# Altium PCB 18650_13s8p.PcbDoc
Units mm, origin at the board's own origin, x right, y up, seen from the top; angles counter-clockwise.
Board outline 80.8 x 121.3 mm, 2 copper layers (Top Layer, Bottom Layer); 89 components, 5 nets, 350 pads, 239 vias.
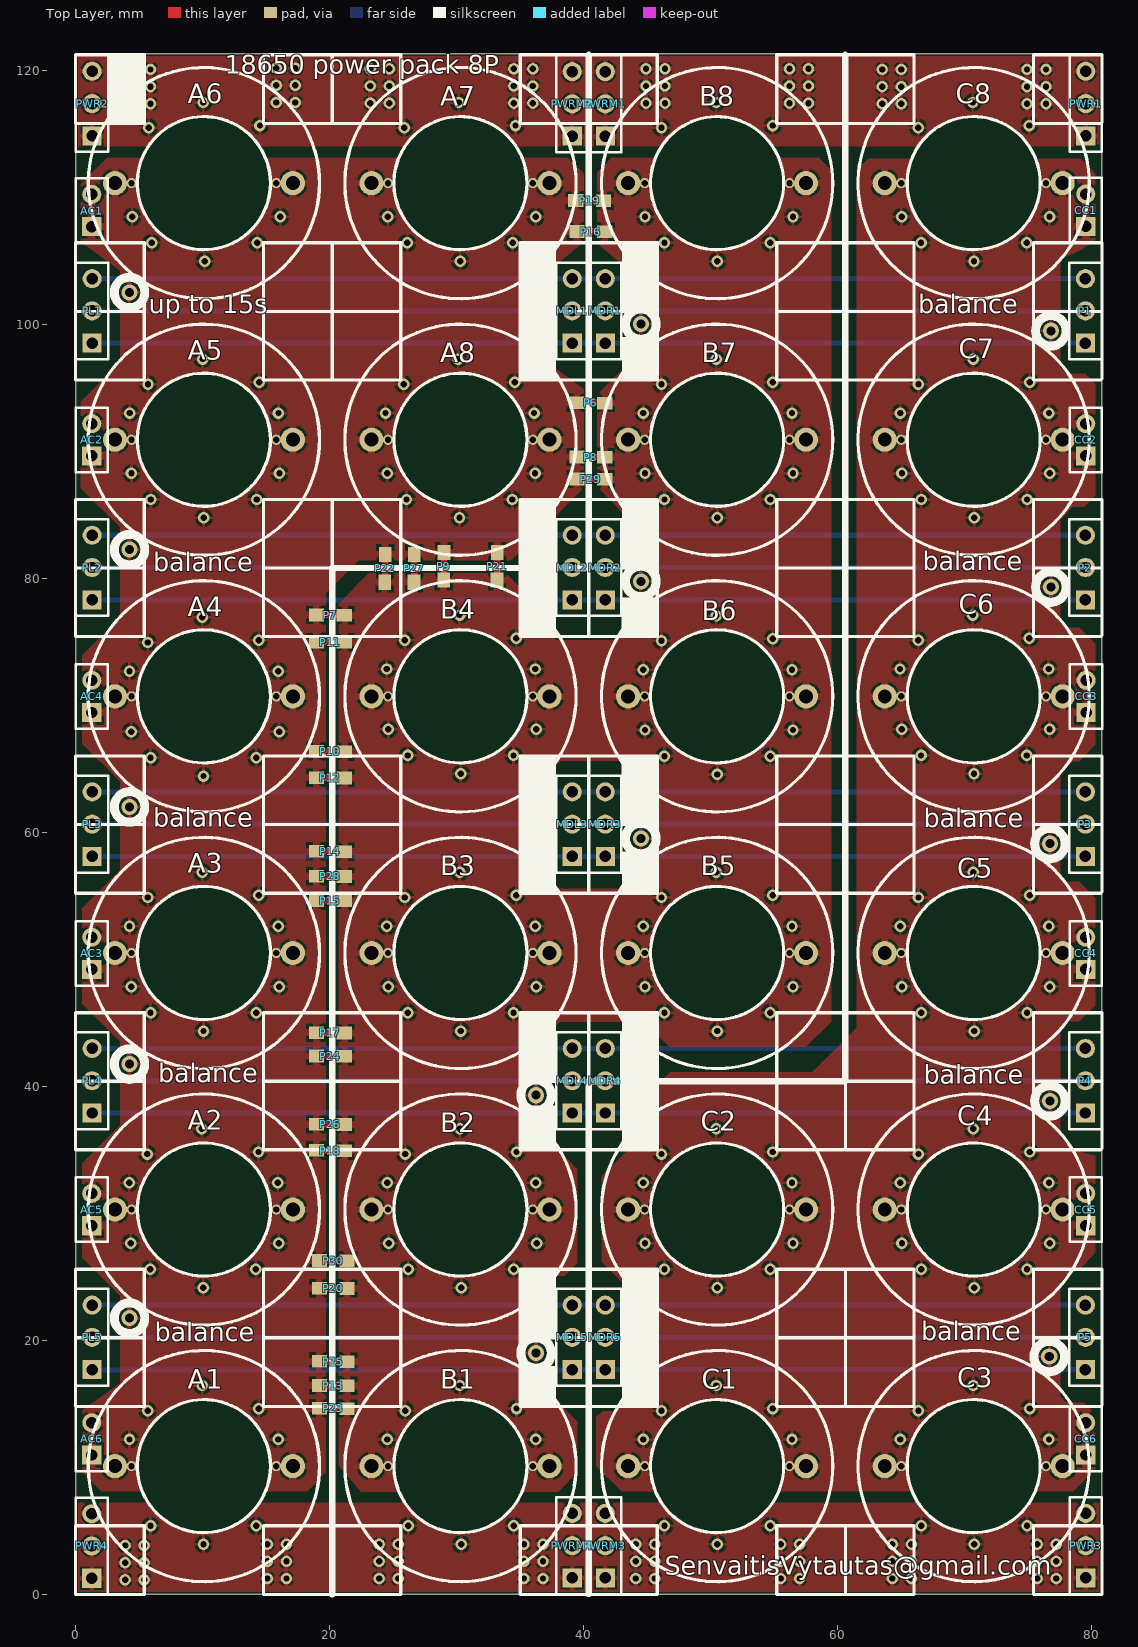
[diagram p0: Top Layer view]
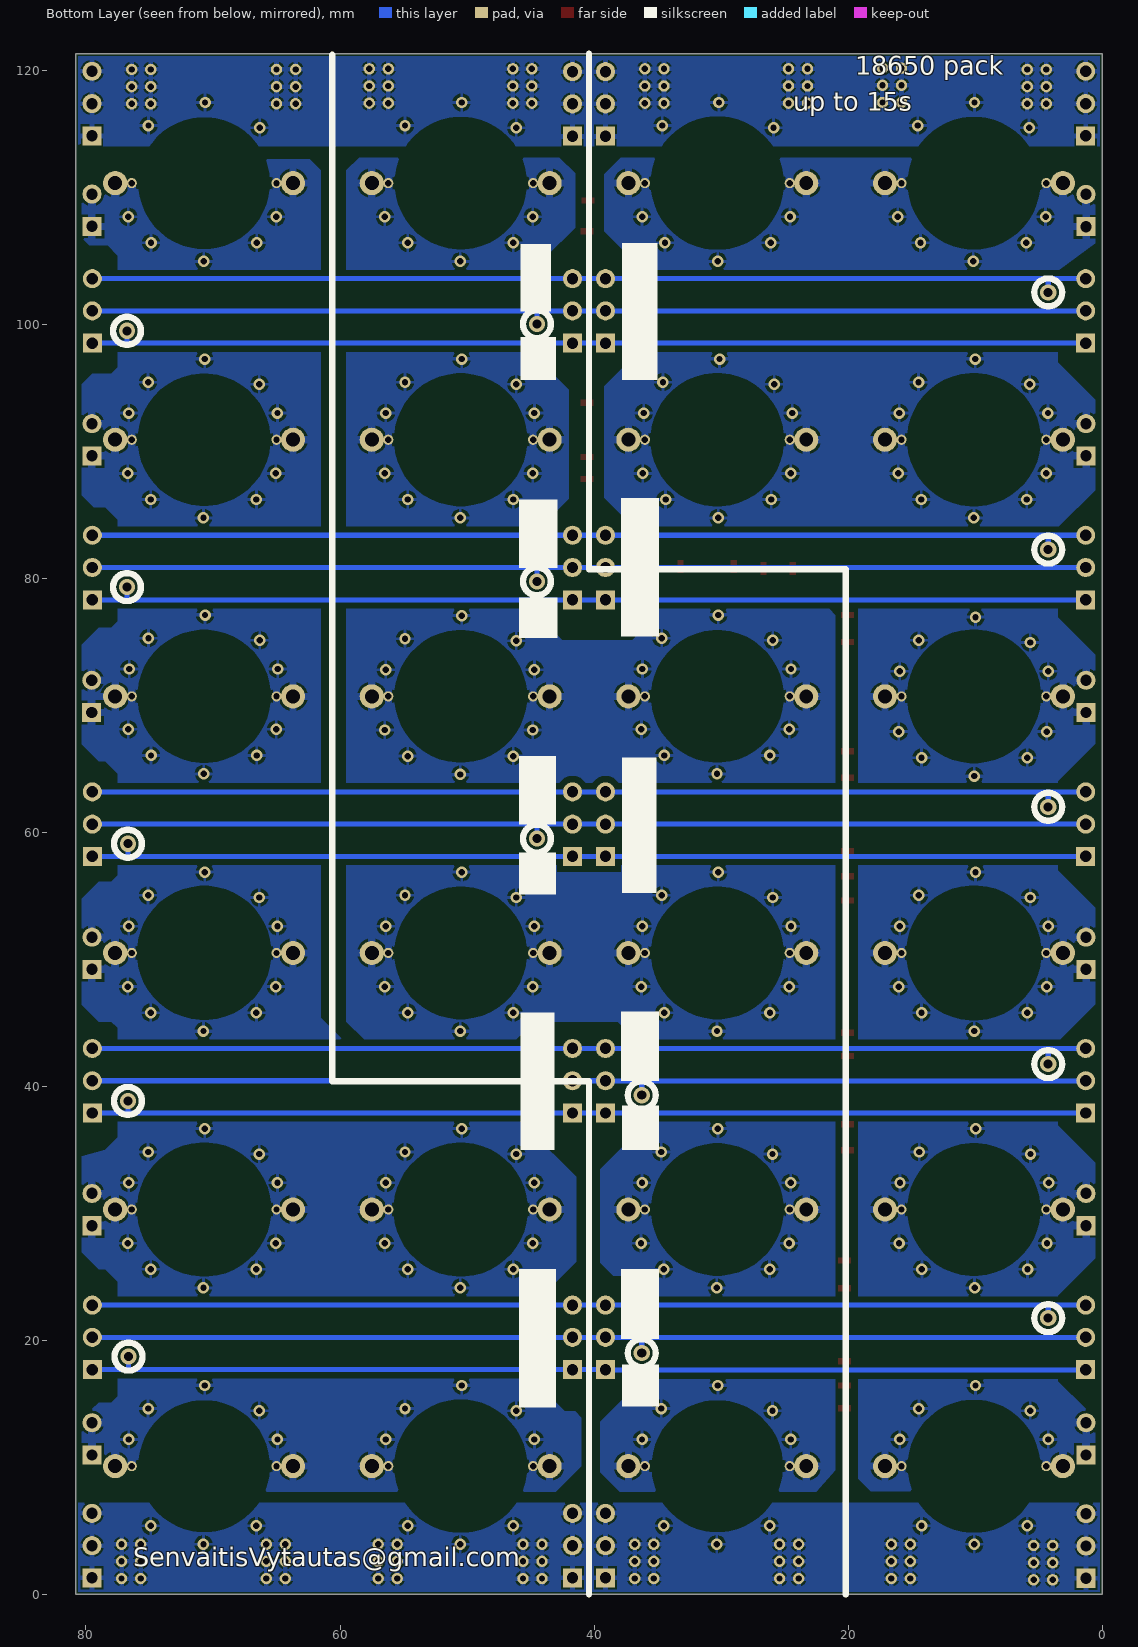
[diagram p1: Bottom Layer view, seen from below]

## Layer stack, top to bottom
Top Solder: solder mask 0.0102, Solder Resist, Dk 3.5
Top Layer: signal copper 0.0356
Dielectric 1: dielectric 0.32, FR-4, Dk 4.8
Bottom Layer: signal copper 0.0356
Bottom Solder: solder mask 0.0102, Solder Resist, Dk 3.5

## Board outline
0,0 80.8,0 80.8,121.3 0,121.3

## Design rules (kind name [scope] priority, off if disabled: settings)
Clearance [All] p1: gap=0.5 ignorepadtopadclearanceinfootprint=FALSE except(0: Arc-Hole Track-Hole SMDPad-Hole THPad-Hole Via-Hole Fill-Hole Poly-Hole Region-Hole Text-Hole)
ComponentClearance [All] p1 off: gap=0.254 collisioncheckmode=3 verticalgap=0.254 showdistances=FALSE
Height [All] p1 off: minheight=0 maxheight=25.4 prefheight=12.7
MinimumSolderMaskSliver [All] p1 off: minsoldermaskwidth=0.254
PolygonConnect PolygonConnect_11 [All vs IsNamedPolygon('PACK3_bottom')] p1: thpad.connectstyle=Relief thpad.reliefconductorwidth=0.6 thpad.reliefentries=4 thpad.polygonreliefangle="90 Angle" thpad.airgapwidth=0.2 smdpad.connectstyle=Relief smdpad.reliefconductorwidth=0.6 smdpad.reliefentries=4 smdpad.polygonreliefangle="90 Angle" smdpad.airgapwidth=0.2 via.connectstyle=Relief via.reliefconductorwidth=0.254 via.reliefentries=4 via.polygonreliefangle="90 Angle" via.airgapwidth=0.254
PolygonConnect PolygonConnect_10 [All vs IsNamedPolygon('PACK2_BOTTOM')] p2: thpad.connectstyle=Relief thpad.reliefconductorwidth=0.6 thpad.reliefentries=4 thpad.polygonreliefangle="90 Angle" thpad.airgapwidth=0.2 smdpad.connectstyle=Relief smdpad.reliefconductorwidth=0.6 smdpad.reliefentries=4 smdpad.polygonreliefangle="90 Angle" smdpad.airgapwidth=0.2 via.connectstyle=Relief via.reliefconductorwidth=0.254 via.reliefentries=4 via.polygonreliefangle="90 Angle" via.airgapwidth=0.254
PolygonConnect PolygonConnect_9 [All vs IsNamedPolygon('PACK1_BOTOM')] p3: thpad.connectstyle=Relief thpad.reliefconductorwidth=0.6 thpad.reliefentries=4 thpad.polygonreliefangle="90 Angle" thpad.airgapwidth=0.2 smdpad.connectstyle=Relief smdpad.reliefconductorwidth=0.6 smdpad.reliefentries=4 smdpad.polygonreliefangle="90 Angle" smdpad.airgapwidth=0.2 via.connectstyle=Relief via.reliefconductorwidth=0.254 via.reliefentries=4 via.polygonreliefangle="90 Angle" via.airgapwidth=0.254
PolygonConnect PolygonConnect_8 [All vs IsNamedPolygon('PACK3')] p4: thpad.connectstyle=Relief thpad.reliefconductorwidth=0.6 thpad.reliefentries=4 thpad.polygonreliefangle="90 Angle" thpad.airgapwidth=0.2 smdpad.connectstyle=Relief smdpad.reliefconductorwidth=0.6 smdpad.reliefentries=4 smdpad.polygonreliefangle="90 Angle" smdpad.airgapwidth=0.2 via.connectstyle=Relief via.reliefconductorwidth=0.254 via.reliefentries=4 via.polygonreliefangle="90 Angle" via.airgapwidth=0.254
PolygonConnect PolygonConnect_7 [All vs IsNamedPolygon('PACK2')] p5: thpad.connectstyle=Relief thpad.reliefconductorwidth=0.6 thpad.reliefentries=4 thpad.polygonreliefangle="90 Angle" thpad.airgapwidth=0.2 smdpad.connectstyle=Relief smdpad.reliefconductorwidth=0.6 smdpad.reliefentries=4 smdpad.polygonreliefangle="90 Angle" smdpad.airgapwidth=0.2 via.connectstyle=Relief via.reliefconductorwidth=0.254 via.reliefentries=4 via.polygonreliefangle="90 Angle" via.airgapwidth=0.254
PolygonConnect PolygonConnect_6 [All vs IsNamedPolygon('PACK1')] p6: thpad.connectstyle=Relief thpad.reliefconductorwidth=0.6 thpad.reliefentries=4 thpad.polygonreliefangle="90 Angle" thpad.airgapwidth=0.2 smdpad.connectstyle=Relief smdpad.reliefconductorwidth=0.6 smdpad.reliefentries=4 smdpad.polygonreliefangle="90 Angle" smdpad.airgapwidth=0.2 via.connectstyle=Relief via.reliefconductorwidth=0.254 via.reliefentries=4 via.polygonreliefangle="90 Angle" via.airgapwidth=0.254
PolygonConnect PolygonConnect_5 [All vs IsNamedPolygon('PWR22_botom')] p7: thpad.connectstyle=Relief thpad.reliefconductorwidth=0.4 thpad.reliefentries=4 thpad.polygonreliefangle="90 Angle" thpad.airgapwidth=0.15 smdpad.connectstyle=Relief smdpad.reliefconductorwidth=0.6 smdpad.reliefentries=4 smdpad.polygonreliefangle="90 Angle" smdpad.airgapwidth=0.2 via.connectstyle=Relief via.reliefconductorwidth=0.254 via.reliefentries=4 via.polygonreliefangle="90 Angle" via.airgapwidth=0.254
PolygonConnect PolygonConnect_4 [All vs IsNamedPolygon('PWR22')] p8: thpad.connectstyle=Relief thpad.reliefconductorwidth=0.4 thpad.reliefentries=4 thpad.polygonreliefangle="90 Angle" thpad.airgapwidth=0.15 smdpad.connectstyle=Relief smdpad.reliefconductorwidth=0.6 smdpad.reliefentries=4 smdpad.polygonreliefangle="90 Angle" smdpad.airgapwidth=0.2 via.connectstyle=Relief via.reliefconductorwidth=0.254 via.reliefentries=4 via.polygonreliefangle="90 Angle" via.airgapwidth=0.254
PolygonConnect PolygonConnect_3 [All vs IsNamedPolygon('PWR11')] p9: thpad.connectstyle=Relief thpad.reliefconductorwidth=0.4 thpad.reliefentries=4 thpad.polygonreliefangle="90 Angle" thpad.airgapwidth=0.15 smdpad.connectstyle=Relief smdpad.reliefconductorwidth=0.6 smdpad.reliefentries=4 smdpad.polygonreliefangle="90 Angle" smdpad.airgapwidth=0.2 via.connectstyle=Relief via.reliefconductorwidth=0.254 via.reliefentries=4 via.polygonreliefangle="90 Angle" via.airgapwidth=0.254
PolygonConnect PolygonConnect_2 [All vs IsNamedPolygon('PWR11_botom')] p10: thpad.connectstyle=Relief thpad.reliefconductorwidth=0.4 thpad.reliefentries=4 thpad.polygonreliefangle="90 Angle" thpad.airgapwidth=0.15 smdpad.connectstyle=Relief smdpad.reliefconductorwidth=0.6 smdpad.reliefentries=4 smdpad.polygonreliefangle="90 Angle" smdpad.airgapwidth=0.2 via.connectstyle=Relief via.reliefconductorwidth=0.254 via.reliefentries=4 via.polygonreliefangle="90 Angle" via.airgapwidth=0.254
PolygonConnect PolygonConnect_1 [All vs IsNamedPolygon('PACK2-_L01_P056')] p11: thpad.connectstyle=Relief thpad.reliefconductorwidth=0.5 thpad.reliefentries=4 thpad.polygonreliefangle="90 Angle" thpad.airgapwidth=0.5 smdpad.connectstyle=Relief smdpad.reliefconductorwidth=0.6 smdpad.reliefentries=4 smdpad.polygonreliefangle="90 Angle" smdpad.airgapwidth=0.2 via.connectstyle=Relief via.reliefconductorwidth=0.254 via.reliefentries=4 via.polygonreliefangle="90 Angle" via.airgapwidth=0.254
PolygonConnect [All] p12: connectstyle=Relief reliefconductorwidth=0.6 reliefentries=4 polygonreliefangle="90 Angle" airgapwidth=0.2
RoutingVias [All] p1: holewidth=0.5 width=0.9 viastyle="Through Hole" minholewidth=0.3 minwidth=0.5 maxholewidth=5 maxwidth=8
SolderMaskExpansion [All] p1: expansion=0.102
Width [All] p1: maxlimit=10 minlimit=0.3 preferedwidth=0.5 minimp=50.000000 maximp=50.000000 favimp=50.000000
27 further rules are at their usual default settings.

## Components (designator, comment, footprint, x,y, rotation, side; value= is the part's Value field where it differs from the comment)
A1 "18650_20mmHolder" 18650holder20_2 10.1,10.1 r0 top
A2 "18650_20mmHolder" 18650holder20_2 10.1,30.3 r0 top
A3 "18650_20mmHolder" 18650holder20_2 10.1,50.5 r0 top
A4 "18650_20mmHolder" 18650holder20_2 10.1,70.7 r0 top
A5 "18650_20mmHolder" 18650holder20_2 10.1,90.9 r0 top
A6 "18650_20mmHolder" 18650holder20_2 10.1,111.1 r0 top
A7 "18650_20mmHolder" 18650holder20_2 30.3,111.1 r0 top
A8 "18650_20mmHolder" 18650holder20_2 30.3,90.9 r0 top
AC1 "Header 2" HDR1X2 1.275,107.675 r90 top
AC2 "Header 2" HDR1X2 1.275,89.625 r90 top
AC3 "Header 2" HDR1X2 1.275,49.2 r90 top
AC4 "Header 2" HDR1X2 1.275,69.425 r90 top
AC5 "Header 2" HDR1X2 1.275,29.025 r90 top
AC6 "Header 2" HDR1X2 1.275,10.975 r90 top
B1 "18650_20mmHolder" 18650holder20_2 30.3,10.1 r0 top
B2 "18650_20mmHolder" 18650holder20_2 30.3,30.3 r0 top
B3 "18650_20mmHolder" 18650holder20_2 30.3,50.5 r0 top
B4 "18650_20mmHolder" 18650holder20_2 30.3,70.7 r0 top
B5 "18650_20mmHolder" 18650holder20_2 50.5,50.5 r0 top
B6 "18650_20mmHolder" 18650holder20_2 50.5,70.7 r0 top
B7 "18650_20mmHolder" 18650holder20_2 50.5,90.9 r0 top
B8 "18650_20mmHolder" 18650holder20_2 50.5,111.1 r180 top
C1 "18650_20mmHolder" 18650holder20_2 50.5,10.1 r0 top
C2 "18650_20mmHolder" 18650holder20_2 50.5,30.3 r0 top
C3 "18650_20mmHolder" 18650holder20_2 70.7,10.1 r0 top
C4 "18650_20mmHolder" 18650holder20_2 70.7,30.3 r0 top
C5 "18650_20mmHolder" 18650holder20_2 70.7,50.5 r0 top
C6 "18650_20mmHolder" 18650holder20_2 70.7,70.7 r0 top
C7 "18650_20mmHolder" 18650holder20_2 70.7,90.9 r0 top
C8 "18650_20mmHolder" 18650holder20_2 70.7,111.1 r0 top
CC1 "Header 2" HDR1X2 79.525,107.7 r90 top
CC2 "Header 2" HDR1X2 79.525,89.625 r90 top
CC3 "Header 2" HDR1X2 79.55,69.425 r90 top
CC4 "Header 2" HDR1X2 79.525,49.2 r90 top
CC5 "Header 2" HDR1X2 79.525,29.025 r90 top
CC6 "Header 2" HDR1X2 79.525,10.975 r90 top
MDL1 "Header 3" HDR1X3 39.1,98.5 r90 top
MDL2 "Header 3" HDR1X3 39.1,78.3 r90 top
MDL3 "Header 3" HDR1X3 39.1,58.1 r90 top
MDL4 "Header 3" HDR1X3 39.1,37.9 r90 top
MDL5 "Header 3" HDR1X3 39.1,17.7 r90 top
MDR1 "Header 3" HDR1X3 41.7,98.5 r90 top
MDR2 "Header 3" HDR1X3 41.7,78.3 r90 top
MDR3 "Header 3" HDR1X3 41.7,58.1 r90 top
MDR4 "Header 3" HDR1X3 41.7,37.9 r90 top
MDR5 "Header 3" HDR1X3 41.7,17.7 r90 top
P1 "Header 3" HDR1X3 79.5,98.5 r90 top
P2 "Header 3" HDR1X3 79.5,78.3 r90 top
P3 "Header 3" HDR1X3 79.5,58.1 r90 top
P4 "Header 3" HDR1X3 79.5,37.9 r90 top
P5 "Header 3" HDR1X3 79.5,17.7 r90 top
P6 "join2" join2_0603 40.5,93.809 r0 top net-tie
P7 "join2" join2_0603 20,77.1 r0 top net-tie
P8 "join2" join2_0603 40.5,89.546 r0 top net-tie
P9 "join2" join2_0603 29,81 r270 top net-tie
P10 "join2" join2_0603 20,66.372 r0 top net-tie
P11 "join2" join2_0603 20,74.978 r0 top net-tie
P12 "join2" join2_0603 20,64.296 r0 top net-tie
P13 "join2" join2_0603 20.224,16.45 r0 top net-tie
P14 "join2" join2_0603 20,58.5 r0 top net-tie
P15 "join2" join2_0603 20,54.626 r0 top net-tie
P16 "join2" join2_0603 40.5,107.3 r0 top net-tie
P17 "join2" join2_0603 20,44.223 r0 top net-tie
P18 "join2" join2_0603 20,34.959 r0 top net-tie
P19 "join2" join2_0603 40.4,109.733 r0 top net-tie
P20 "join2" join2_0603 20.224,24.109 r0 top net-tie
P21 "join2" join2_0603 33.195,81 r270 top net-tie
P22 "join2" join2_0603 24.373,80.84 r270 top net-tie
P23 "join2" join2_0603 20.224,14.65 r0 top net-tie
P24 "join2" join2_0603 20,42.384 r0 top net-tie
P25 "join2" join2_0603 20.224,18.348 r0 top net-tie
P26 "join2" join2_0603 20,37.018 r0 top net-tie
P27 "join2" join2_0603 26.668,80.84 r270 top net-tie
P28 "join2" join2_0603 20,56.537 r0 top net-tie
P29 "join2" join2_0603 40.5,87.805 r0 top net-tie
P30 "join2" join2_0603 20.224,26.29 r0 top net-tie
PL1 "Header 3" HDR1X3 1.3,98.5 r90 top
PL2 "Header 3" HDR1X3 1.3,78.3 r90 top
PL3 "Header 3" HDR1X3 1.3,58.1 r90 top
PL4 "Header 3" HDR1X3 1.3,37.9 r90 top
PL5 "Header 3" HDR1X3 1.3,17.7 r90 top
PWR1 "Header 3" HDR1X3 79.525,114.825 r90 top
PWR2 "Header 3" HDR1X3 1.3,114.825 r90 top
PWR3 "Header 3" HDR1X3 79.525,1.3 r90 top
PWR4 "Header 3" HDR1X3 1.275,1.275 r90 top
PWRM1 "Header 3" HDR1X3 41.7,114.8 r90 top
PWRM2 "Header 3" HDR1X3 39.1,114.8 r90 top
PWRM3 "Header 3" HDR1X3 41.7,1.3 r90 top
PWRM4 "Header 3" HDR1X3 39.1,1.3 r90 top

## Footprints (in the part's own frame and the unit in brackets; to place one, negate y for a bottom-side part, rotate by r counter-clockwise, add the part's x,y. Pads: shape width x height; smd on the part's side, far side on the other; paste and mask are expansions set on the pad)
18650holder20_2 [mm] "18650 holderio footprint kad butu skyle ir sujungimai"
  round 0.8 hole 0.5: 1(5.7,0) 2(-5.7,0)
  round 1.9 hole 1.1: 1(7,0) 2(-7,0)
  silkscreen extent -10.1,-10.1 10.1,10.1, body extent -10.1,-10.1 10.1,10.1
HDR1X2 [mm] "Connector; Header; 2 Position"
  rect 1.5x1.5 hole 0.9: 1(0,0)
  round 1.5 hole 0.9: 2(2.54,0)
  silkscreen extent -1.27,-1.27 3.81,1.27, body extent -1.27,-1.27 3.81,1.27, height 8.5
HDR1X3 [mm] "Connector; Header; 3 Position"
  rect 1.5x1.5 hole 0.9: 1(0,0)
  round 1.5 hole 0.9: 2(2.54,0) 3(5.08,0)
  silkscreen extent -1.27,-1.27 6.35,1.27, body extent -1.27,-1.27 6.35,1.27, height 8.5
join2_0603 [mm] "join2 2leads"
  rect 1.2x1 smd paste+0 mask+0.102: 1(-1.025,0) 2(1.15,-0.025)
  Top Layer region: -0.45,-0.25 0.575,-0.25 0.575,0.25 -0.45,0.25

## Part data
A1 A2 A3 A4 A5 A6 A7 A8 B1 B2 B3 B4 B5 B6 B7 B8 C1 C2 C3 C4 C5 C6 C7 C8: "20mm holder 18650 sujungimai tiek - tiek pliuso", LatestRevisionDate=17-Jul-2002, LatestRevisionNote="Re-released for DXP Platform.", PackageDescription="Battery; 2 Leads", PackageReference=BAT-2, Published=24-Mar-1999, Publisher="Altium Limited"
AC1 AC2 AC3 AC4 AC5 AC6 CC1 CC2 CC3 CC4 CC5 CC6 P6 P7 P8 P9 P10 P11 P12 P13 P14 P15 P16 P17 P18 P19 P20 P21 P22 P23 P24 P25 P26 P27 P28 P29 P30: "Header, 2-Pin", LatestRevisionDate=17-Jul-2002, LatestRevisionNote="Re-released for DXP Platform.", Publisher="Altium Limited"
MDL1 MDL2 MDL3 MDL4 MDL5 MDR1 MDR2 MDR3 MDR4 MDR5 P1 P2 P3 P4 P5 PL1 PL2 PL3 PL4 PL5 PWR1 PWR2 PWR3 PWR4 PWRM1 PWRM2 PWRM3 PWRM4: "Header, 3-Pin", LatestRevisionDate=17-Jul-2002, LatestRevisionNote="Re-released for DXP Platform.", Publisher="Altium Limited"

## Free pads (board coordinates)
  round 0.9 hole 0.5 mask+0.102: 2(3.9,3.85) 2(15.1,3.95) 2(23.9,3.95) 2(35.3,3.95) 2(44.1,3.95) 2(55.5,3.95) 2(64.3,3.95) 2(75.7,3.95) 3(3.9,2.5) 3(15.1,2.6) 3(23.9,2.6) 3(35.3,2.6) 3(44.1,2.6) 3(55.5,2.6) 3(64.3,2.6) 3(75.7,2.6) 4(5.4,3.85) 4(16.6,3.95) 4(25.4,3.95) 4(36.8,3.95) 4(45.6,3.95) 4(57,3.95) 4(65.8,3.95) 4(77.2,3.95) 5(5.4,2.5) 5(16.6,2.6) 5(25.4,2.6) 5(36.8,2.6) 5(45.6,2.6) 5(57,2.6) 5(65.8,2.6) 5(77.2,2.6) 6(5.4,1.15) 6(16.6,1.25) 6(25.4,1.25) 6(36.8,1.25) 6(45.6,1.25) 6(57,1.25) 6(65.8,1.25) 6(77.2,1.25) 7(3.9,1.15) 7(15.1,1.25) 7(23.9,1.25) 7(35.3,1.25) 7(44.1,1.25) 7(55.5,1.25) 7(64.3,1.25) 7(75.7,1.25)
  round 0.9 hole 0.5: 2(4.4,120.05) 2(15.8,120.15) 2(23.2,120.1) 2(34.5,120.1) 2(44.9,120.1) 2(56.2,120.1) 2(63.5,120.05) 2(74.9,120.05) 3(4.4,118.7) 3(15.8,118.8) 3(23.2,118.75) 3(34.5,118.75) 3(44.9,118.75) 3(56.2,118.75) 3(63.5,118.7) 3(74.9,118.7) 4(5.9,120.05) 4(17.3,120.15) 4(24.7,120.1) 4(36,120.1) 4(46.4,120.1) 4(57.7,120.1) 4(65,120.05) 4(76.4,120.05) 5(5.9,118.7) 5(17.3,118.8) 5(24.7,118.75) 5(36,118.75) 5(46.4,118.75) 5(57.7,118.75) 5(65,118.7) 5(76.4,118.7) 6(5.9,117.35) 6(17.3,117.45) 6(24.7,117.4) 6(36,117.4) 6(46.4,117.4) 6(57.7,117.4) 6(65,117.35) 6(76.4,117.35) 7(4.4,117.35) 7(15.8,117.45) 7(23.2,117.4) 7(34.5,117.4) 7(44.9,117.4) 7(56.2,117.4) 7(63.5,117.35) 7(74.9,117.35)

## Via types
v1: diameter 0.9, hole 0.5, Top Layer to Bottom Layer, tented both sides, 224 vias
v2: diameter 1.27, hole 0.711, Top Layer to Bottom Layer, tented both sides, 15 vias

## Nets (pads, with @x,y where several pads share a name; then routed paths per layer and width w, separated by ;. In a path a pad name is that pad's centre, name@x,y a point inside that pad or via, vN(x,y) a via of type N, cw(c..) or ccw(c..) an arc to the next point about the centre after c; other vN are vias at no path point)
NetPWR1_1: pad.2@4.4,120.05 pad.2@15.8,120.15 pad.2@23.2,120.1 pad.2@34.5,120.1 pad.2@44.9,120.1 pad.2@56.2,120.1 pad.2@63.5,120.05 pad.2@74.9,120.05 pad.3@4.4,118.7 pad.3@15.8,118.8 pad.3@23.2,118.75 pad.3@34.5,118.75 pad.3@44.9,118.75 pad.3@56.2,118.75 pad.3@63.5,118.7 pad.3@74.9,118.7 pad.4@5.9,120.05 pad.4@17.3,120.15 pad.4@24.7,120.1 pad.4@36,120.1 pad.4@46.4,120.1 pad.4@57.7,120.1 pad.4@65,120.05 pad.4@76.4,120.05 pad.5@5.9,118.7 pad.5@17.3,118.8 pad.5@24.7,118.75 pad.5@36,118.75 pad.5@46.4,118.75 pad.5@57.7,118.75 pad.5@65,118.7 pad.5@76.4,118.7 pad.6@5.9,117.35 pad.6@17.3,117.45 pad.6@24.7,117.4 pad.6@36,117.4 pad.6@46.4,117.4 pad.6@57.7,117.4 pad.6@65,117.35 pad.6@76.4,117.35 pad.7@4.4,117.35 pad.7@15.8,117.45 pad.7@23.2,117.4 pad.7@34.5,117.4 pad.7@44.9,117.4 pad.7@56.2,117.4 pad.7@63.5,117.35 pad.7@74.9,117.35 PWR1.1 PWR1.2 PWR1.3 PWR2.1 PWR2.2 PWR2.3 PWRM1.1 PWRM1.2 PWRM1.3 PWRM2.1 PWRM2.2 PWRM2.3
  other v1: 5.757,115.466 25.873,115.467 46.127,115.466 66.327,115.467 14.514,115.632 34.63,115.632 54.884,115.632 75.084,115.632 10.057,117.45 30.173,117.45 50.427,117.45 70.627,117.45
NetPWR3_1: pad.2@3.9,3.85 pad.2@15.1,3.95 pad.2@23.9,3.95 pad.2@35.3,3.95 pad.2@44.1,3.95 pad.2@55.5,3.95 pad.2@64.3,3.95 pad.2@75.7,3.95 pad.3@3.9,2.5 pad.3@15.1,2.6 pad.3@23.9,2.6 pad.3@35.3,2.6 pad.3@44.1,2.6 pad.3@55.5,2.6 pad.3@64.3,2.6 pad.3@75.7,2.6 pad.4@5.4,3.85 pad.4@16.6,3.95 pad.4@25.4,3.95 pad.4@36.8,3.95 pad.4@45.6,3.95 pad.4@57,3.95 pad.4@65.8,3.95 pad.4@77.2,3.95 pad.5@5.4,2.5 pad.5@16.6,2.6 pad.5@25.4,2.6 pad.5@36.8,2.6 pad.5@45.6,2.6 pad.5@57,2.6 pad.5@65.8,2.6 pad.5@77.2,2.6 pad.6@5.4,1.15 pad.6@16.6,1.25 pad.6@25.4,1.25 pad.6@36.8,1.25 pad.6@45.6,1.25 pad.6@57,1.25 pad.6@65.8,1.25 pad.6@77.2,1.25 pad.7@3.9,1.15 pad.7@15.1,1.25 pad.7@23.9,1.25 pad.7@35.3,1.25 pad.7@44.1,1.25 pad.7@55.5,1.25 pad.7@64.3,1.25 pad.7@75.7,1.25 PWR3.1 PWR3.2 PWR3.3 PWR4.1 PWR4.2 PWR4.3 PWRM3.1 PWRM3.2 PWRM3.3 PWRM4.1 PWRM4.2 PWRM4.3
  other v1: 10.073,3.95 30.354,3.95 50.527,3.95 70.754,3.95 5.904,5.397 14.223,5.397 26.185,5.397 34.504,5.397 46.358,5.397 54.677,5.397 66.585,5.397 74.904,5.397
PACK1+: A1.1 A1.2 A2.1 A2.2 A3.1 A3.2 A4.1 A4.2 A5.1 A5.2 A6.1 A6.2 A7.1 A7.2 A8.1 A8.2 AC1.1 AC1.2 AC2.1 AC2.2 AC3.1 AC3.2 AC4.1 AC4.2 AC5.1 AC5.2 AC6.1 AC6.2 MDL1.3 MDL2.3 MDL3.3 MDL4.3 MDL5.3 MDR1.3 MDR2.3 MDR3.3 MDR4.3 MDR5.3 P1.3 P2.3 P3.3 P4.3 P5.3 P6.1 P7.1 P8.1 P9.1 P10.1 P11.1 P12.1 P13.1 P14.1 P15.1 P16.1 P17.1 P18.1 P19.1 P20.1 P21.1 P22.1 P23.1 P24.1 P25.1 P26.1 P27.1 P28.1 P29.1 P30.1 PL1.3 PL2.3 PL3.3 PL4.3 PL5.3 | length 396.6
  Top Layer w0.5: A2.1@17.1,30.3 A2.1@17.125,30.275
  Bottom Layer w0.4: PL5.3 4.25,22.78 ; PL4.3 4.25,42.98 ; PL3.3 4.25,63.18 ; PL2.3 4.25,83.38 ; PL1.3 4.25,103.58 ; v2(4.25,21.75) 4.25,22.78 ; v2(4.25,41.75) 4.25,42.98 ; v2(4.25,62) 4.25,63.18 ; v2(4.25,82.25) 4.25,83.38 ; v2(4.25,102.5) 4.25,103.58 ; P4.3@79.4,42.98 MDR4.3 MDL4.3 4.25,42.98 ; P5.3 MDR5.3 MDL5.3 4.25,22.78 ; P3.3 MDR3.3 MDL3.3 4.25,63.18 ; P2.3 MDR2.3 MDL2.3 4.25,83.38 ; P1.3 MDR1.3 MDL1.3 4.25,103.58
  other v1: 4.246,12.2 15.944,12.2 5.673,14.466 14.43,14.631 9.973,16.45 10.046,24.15 5.877,25.597 14.196,25.597 4.346,27.65 15.994,27.65 4.219,32.4 15.917,32.4 5.646,34.666 14.403,34.832 9.946,36.65 10.073,44.35 5.904,45.797 14.223,45.797 4.373,47.85 16.021,47.85 4.246,52.6 15.944,52.6 5.673,54.866 14.43,55.032 9.973,56.85 10.073,64.423 5.904,65.87 14.223,65.87 4.373,67.923 16.021,67.923 4.246,72.673 15.944,72.673 5.673,74.939 14.43,75.105 9.973,76.923 10.1,84.75 30.223,84.75 5.931,86.197 14.25,86.197 26.054,86.197 34.373,86.197 4.4,88.25 16.048,88.25 24.523,88.25 36.171,88.25 4.273,93 15.971,93 24.396,93 36.094,93 5.7,95.266 25.823,95.266 14.457,95.432 34.58,95.432 10,97.25 30.123,97.25 10.157,104.95 30.273,104.95 5.987,106.397 14.307,106.397 26.104,106.397 34.423,106.397 4.457,108.45 16.105,108.45 24.573,108.45 36.221,108.45
PACK2-: B1.1 B1.2 B2.1 B2.2 B3.1 B3.2 B4.1 B4.2 B5.1 B5.2 B6.1 B6.2 B7.1 B7.2 B8.1 B8.2 MDL1.2 MDL2.2 MDL3.2 MDL4.2 MDL5.2 MDR1.2 MDR2.2 MDR3.2 MDR4.2 MDR5.2 P1.2 P2.2 P3.2 P4.2 P5.2 P6.2 P7.2 P8.2 P9.2 P10.2 P11.2 P12.2 P13.2 P14.2 P15.2 P16.2 P17.2 P18.2 P19.2 P20.2 P21.2 P22.2 P23.2 P24.2 P25.2 P26.2 P27.2 P28.2 P29.2 P30.2 PL1.2 PL2.2 PL3.2 PL4.2 PL5.2 | length 396.3
  Bottom Layer w0.4: PL5.2 36.25,20.24 ; PL4.2 1.325,40.415 36.25,40.415 ; PL3.2 MDL3.2 MDR3.2 44.5,60.64 ; PL2.2 MDL2.2 MDR2.2 44.5,80.84 ; PL1.2 MDL1.2 MDR1.2 P1.2 ; v2(36.25,19) 36.25,20.24 ; v2(36.25,39.3) 36.25,40.415 ; v2(44.5,59.5) 44.5,60.64 ; v2(44.5,79.75) 44.5,80.84 ; v2(44.5,100) 44.5,100.79 ; P4.2@79.4,40.44 MDR4.2 MDL4.2 39.075,40.415 36.25,40.415 ; P5.2 MDR5.2 MDL5.2 36.25,20.24 ; P3.2 44.5,60.64 ; P2.2 44.5,80.84
  other v1: 24.527,12.2 36.225,12.2 25.954,14.466 34.711,14.632 30.254,16.45 30.354,24.15 26.185,25.597 34.504,25.597 24.654,27.65 36.302,27.65 24.527,32.4 36.225,32.4 25.954,34.666 34.711,34.832 30.254,36.65 30.327,44.35 50.527,44.35 26.158,45.797 34.477,45.797 46.358,45.797 54.677,45.797 24.627,47.85 36.275,47.85 44.827,47.85 56.475,47.85 24.5,52.6 36.198,52.6 44.7,52.6 56.398,52.6 25.927,54.866 46.127,54.866 34.684,55.032 54.884,55.032 30.227,56.85 50.427,56.85 50.527,64.55 30.327,64.6 46.358,65.997 54.677,65.997 26.158,66.047 34.477,66.047 44.827,68.05 56.475,68.05 24.627,68.1 36.275,68.1 44.7,72.8 56.398,72.8 24.5,72.85 36.198,72.85 46.127,75.066 25.927,75.116 54.884,75.232 34.684,75.282 50.427,77.05 30.227,77.1 50.527,84.75 46.358,86.197 54.677,86.197 44.827,88.25 56.475,88.25 44.7,93 56.398,93 46.127,95.266 54.884,95.432 50.427,97.25 50.527,104.95 46.358,106.397 54.677,106.397 44.827,108.45 56.475,108.45
PACK3: C1.1 C1.2 C2.1 C2.2 C3.1 C3.2 C4.1 C4.2 C5.1 C5.2 C6.1 C6.2 C7.1 C7.2 C8.1 C8.2 CC1.1 CC1.2 CC2.1 CC2.2 CC3.1 CC3.2 CC4.1 CC4.2 CC5.1 CC5.2 CC6.1 CC6.2 MDL1.1 MDL2.1 MDL3.1 MDL4.1 MDL5.1 MDR1.1 MDR2.1 MDR3.1 MDR4.1 MDR5.1 P1.1 P2.1 P3.1 P4.1 P5.1 PL1.1 PL2.1 PL3.1 PL4.1 PL5.1 | length 396
  Bottom Layer w0.4: PL5.1 1.335,17.665 39.065,17.665 MDL5.1 MDR5.1 76.75,17.7 ; PL4.1 MDL4.1 MDR4.1 76.75,37.9 ; PL3.1 MDL3.1 MDR3.1 76.75,58.1 ; PL2.1 MDL2.1 MDR2.1 76.75,78.3 ; PL1.1 MDL1.1 MDR1.1 76.75,98.5 ; v2(76.65,18.725) 76.65,17.8 76.75,17.7 ; v2(76.7,38.85) 76.7,37.95 76.75,37.9 ; v2(76.7,59.1) 76.7,58.15 76.75,58.1 ; v2(76.775,79.3) 76.775,78.325 76.75,78.3 ; v2(76.775,99.475) 76.775,98.525 76.75,98.5 ; P4.1@79.4,37.9 76.75,37.9 ; P5.1 76.75,17.7 ; P3.1 76.75,58.1 ; P2.1 76.75,78.3 ; P1.1 76.75,98.5
  other v1: 44.7,12.2 56.398,12.2 64.927,12.2 76.625,12.2 46.127,14.466 66.354,14.466 54.884,14.632 75.111,14.632 50.427,16.45 70.654,16.45 50.527,24.15 70.754,24.15 46.358,25.597 54.677,25.597 66.585,25.597 74.904,25.597 44.827,27.65 56.475,27.65 65.054,27.65 76.702,27.65 44.7,32.4 56.398,32.4 64.927,32.4 76.625,32.4 46.127,34.666 66.354,34.666 54.884,34.832 75.111,34.832 50.427,36.65 70.654,36.65 70.754,44.35 66.585,45.797 74.904,45.797 65.054,47.85 76.702,47.85 64.927,52.6 76.625,52.6 66.354,54.866 75.111,55.032 70.654,56.85 70.727,64.6 66.558,66.047 74.877,66.047 65.027,68.1 76.675,68.1 64.9,72.85 76.598,72.85 66.327,75.116 75.084,75.282 70.627,77.1 70.754,84.75 66.585,86.197 74.904,86.197 65.054,88.25 76.702,88.25 64.927,93 76.625,93 66.354,95.266 75.111,95.432 70.654,97.25 70.727,104.95 66.558,106.397 74.877,106.397 65.027,108.45 76.675,108.45

## Polygon pours and split planes (outlines as drawn)
NetPWR1_1 on Top Layer "PWR11" (solid, pour order 239): 0.2,114 5.735,114 cw(c10.1,111.1) 10.1,116.34 cw(c10.1,111.1) 14.465,114 25.91,114 cw(c30.3,111.1) 30.3,116.361 cw(c30.3,111.1) 34.69,114 46.154,114 cw(c50.5,111.1) 50.5,116.325 cw(c50.5,111.1) 54.846,114 66.384,114 cw(c70.7,111.1) 70.7,116.3 cw(c70.7,111.1) 75.016,114 80.5,114 80.6,114.1 80.6,121.1 0.2,121.1
NetPWR3_1 on Top Layer "PWR22" (solid, pour order 237): 0.2,0.2 80.6,0.2 80.6,7.2 75.021,7.2 cw(c70.7,10.1) 70.7,4.896 cw(c70.7,10.1) 66.379,7.2 54.892,7.2 cw(c50.5,10.1) 50.5,4.837 cw(c50.5,10.1) 46.108,7.2 34.616,7.2 cw(c30.3,10.1) 30.3,4.9 cw(c30.3,10.1) 25.984,7.2 14.465,7.2 cw(c10.1,10.1) 10.1,4.86 cw(c10.1,10.1) 5.735,7.2 0.2,7.2
PACK3 on Top Layer "PACK3" (solid, pour order 236): 55.367,8.109 65.895,8.109 cw(c70.699,10.109) 65.495,10.109 cw(c70.699,10.109) 70.699,15.313 cw(c70.699,10.109) 75.903,10.109 cw(c70.702,10.109) 75.503,8.109 78.534,8.109 80.285,9.86 80.285,14.198 79.374,15.109 77.999,15.109 77.499,15.609 77.499,24.609 78.499,25.609 78.999,25.609 80.285,26.895 80.285,34.533 78.499,35.009 77.499,36.009 77.499,44.609 77.999,45.109 78.999,45.109 80.285,46.395 80.285,54.823 78.999,56.109 77.999,56.109 77.499,56.609 77.499,64.609 78.499,65.609 78.999,65.609 80.285,66.895 80.285,74.823 78.999,76.109 77.999,76.109 77.499,76.609 77.499,84.609 78.499,85.609 79.399,85.609 80.285,86.495 80.285,95.323 79.499,96.109 77.999,96.109 77.499,96.609 77.499,105.109 78.999,105.791 80.285,106.609 80.285,111.842 79.123,113.004 75.541,113.004 cw(c70.705,111.11) 75.899,111.109 cw(c70.699,111.109) 70.699,105.909 cw(c70.699,111.109) 65.499,111.109 cw(c70.699,111.109) 65.856,113.004 62.394,113.004 61.499,112.109 61.499,44.599 58.009,41.109 46.821,41.109 45.129,39.416 45.129,36.609 41.42,32.905 41.42,26.184 43.499,24.109 43.499,15.609 42.322,14.433 41.499,14.433 40.999,13.933 40.999,10.109 42.999,8.109 45.63,8.109 cw(c50.499,10.109) 45.236,10.109 cw(c50.499,10.109) 50.499,15.372 cw(c50.499,10.109) 55.762,10.109 cw(c50.502,10.109)
PACK2- on Top Layer "PACK2" (solid, pour order 235): 35.1,8.1 38,8.1 39.5,9.6 39.5,13.6 36.988,16.112 36.988,24.388 37.7,25.1 38.5,25.1 39.5,26.1 39.5,33.478 36.988,35.99 36.988,43.965 38.123,45.1 44.72,45.1 46.72,43.1 57.5,43.1 59.5,45.1 59.5,112.1 58.5,113.1 55.327,113.1 cw(c50.503,111.101) 55.725,111.1 cw(c50.5,111.1) 50.5,105.875 cw(c50.5,111.1) 45.275,111.1 cw(c50.5,111.1) 45.673,113.1 42.224,113.1 41.075,111.951 41.075,106.381 43.75,104.068 43.75,97.134 41.075,94.459 41.075,87.167 43.75,84.492 43.75,76.35 42.5,75.1 37.849,75.1 35.488,77.461 35.488,78.772 33.87,80.39 23.09,80.39 20.7,78 20.7,10.123 22.5,8.1 25.5,8.1 cw(c30.3,10.1) 25.1,10.1 cw(c30.3,10.1) 30.3,15.3 cw(c30.3,10.1) 35.5,10.1 cw(c30.302,10.1)
PACK1+ on Top Layer "PACK1" (solid, pour order 234): 22.3,81.4 34.286,81.4 40,87.114 40,94.862 37,97.067 37,104 40,106.472 40,111.857 38.757,113.1 35.166,113.1 cw(c30.308,111.102) 35.561,111.1 cw(c30.3,111.1) 30.3,105.839 cw(c30.3,111.1) 25.039,111.1 cw(c30.3,111.1) 25.434,113.1 14.944,113.1 cw(c10.108,111.102) 15.34,111.1 cw(c10.1,111.1) 10.1,105.86 cw(c10.1,111.1) 4.86,111.1 cw(c10.1,111.1) 5.256,113.1 2.492,113.1 0.4,111.008 0.4,106.467 3.5,104.2 3.5,97 0.4,93.9 0.4,87.09 3.5,84.005 3.5,76.924 0.514,73.937 0.514,66.986 3.5,64 3.5,57 0.514,54.014 0.514,46.486 3.5,43.5 3.5,36.931 0.514,33.945 0.514,26.486 3.5,23.5 3.5,16.615 0.514,14.515 0.514,9.652 2.066,8.1 2.104,8.138 5.241,8.138 cw(c10.102,10.1) 4.86,10.1 cw(c10.1,10.1) 10.1,15.34 cw(c10.1,10.1) 15.34,10.1 cw(c10.11,10.098) 14.959,8.138 18.238,8.138 19.7,9.6 19.7,78.8
PACK3 on Bottom Layer "PACK3_bottom" (solid, remove dead copper, pour order 258): 75.504,8.1 78.45,8.1 80.325,9.975 80.325,13.775 79,15.1 78,15.1 77.5,15.6 77.5,24.6 78.5,25.6 79,25.6 80.325,26.925 80.325,34.513 78.5,35 77.5,36 77.5,44.6 78,45.1 79,45.1 80.325,46.425 80.325,54.775 79,56.1 78,56.1 77.5,56.6 77.5,64.6 78.5,65.6 79,65.6 80.325,66.925 80.325,74.775 79,76.1 78,76.1 77.5,76.6 77.5,84.6 78.5,85.6 79.4,85.6 80.325,86.525 80.325,95.275 79.5,96.1 78,96.1 77.5,96.6 77.5,105.4 78.3,106.2 79.75,106.2 80.325,106.775 80.325,111.795 79.124,112.995 75.542,112.995 cw(c70.706,111.101) 75.9,111.101 cw(c70.7,111.1) 70.7,105.9 cw(c70.7,111.1) 65.5,111.1 cw(c70.7,111.1) 65.858,112.995 62.395,112.995 61.5,112.1 61.5,45.388 57.212,41.1 46.822,41.1 45.13,39.407 45.13,36.6 41.422,32.897 41.422,26.175 43.5,24.1 43.5,15.6 42.324,14.424 41.5,14.424 41,13.924 41,10.1 43,8.1 45.632,8.1 cw(c50.501,10.1) 45.237,10.1 cw(c50.5,10.1) 50.5,15.363 cw(c50.5,10.1) 55.763,10.1 cw(c50.504,10.099) 55.368,8.1 65.896,8.1 cw(c70.701,10.1) 65.496,10.1 cw(c70.7,10.1) 70.7,15.304 cw(c70.7,10.1) 75.904,10.1 cw(c70.703,10.1)
PACK2- on Bottom Layer "PACK2_BOTTOM" (solid, remove dead copper, pour order 242): 35.1,8.1 38,8.1 39.5,9.6 39.5,13.6 36.988,16.112 36.988,24.388 37.7,25.1 38.5,25.1 39.5,26.1 39.5,33.478 36.988,35.99 36.988,43.965 38.123,45.1 44.72,45.1 46.72,43.1 57.5,43.1 59.5,45.1 59.5,112.1 58.5,113.1 55.327,113.1 cw(c50.502,111.1) 55.725,111.1 cw(c50.5,111.1) 50.5,105.875 cw(c50.5,111.1) 45.275,111.1 cw(c50.5,111.1) 45.673,113.1 42.733,113.1 41.5,111.867 41.5,107.6 43.75,105.35 43.75,96.593 42,94.843 42,86.242 43.75,84.492 43.75,76.35 42.5,75.1 36.988,75.1 35.488,76.6 35.488,78.772 34.66,79.6 23.5,79.6 21,77.1 21,9.786 22.5,8.1 25.5,8.1 cw(c30.3,10.1) 25.1,10.1 cw(c30.3,10.1) 30.3,15.3 cw(c30.3,10.1) 35.5,10.1 cw(c30.301,10.1)
PACK1+ on Bottom Layer "PACK1_BOTOM" (solid, remove dead copper, pour order 241): 14.959,8.138 18.238,8.138 19.2,9.1 19.2,78.3 22.8,81.9 34.786,81.9 39.2,86.314 39.2,95.1 37,97.3 37,105.1 39.2,107.3 39.2,111.8 37.9,113.1 35.166,113.1 cw(c30.304,111.101) 35.561,111.101 cw(c30.3,111.1) 30.3,105.839 cw(c30.3,111.1) 25.039,111.1 cw(c30.3,111.1) 25.434,113.1 14.944,113.1 cw(c10.104,111.101) 15.34,111.101 cw(c10.1,111.1) 10.1,105.86 cw(c10.1,111.1) 4.86,111.1 cw(c10.1,111.1) 5.256,113.1 2.492,113.1 0.55,111.158 0.55,106.375 3.5,104.2 3.5,97 0.55,94.05 0.55,86.941 3.5,84.005 3.5,76.924 0.55,73.974 0.55,66.95 3.5,64 3.5,57 0.55,54.05 0.55,46.45 3.5,43.5 3.5,36.931 0.55,33.981 0.55,26.45 3.5,23.5 3.5,16.8 0.55,13.85 0.55,9.616 2.066,8.1 2.104,8.138 5.241,8.138 cw(c10.101,10.1) 4.86,10.1 cw(c10.1,10.1) 10.1,15.34 cw(c10.1,10.1) 15.34,10.1 cw(c10.103,10.099)
NetPWR1_1 on Bottom Layer "PWR11_botom" (solid, pour order 240): 0.2,114 5.735,114 cw(c10.1,111.1) 10.1,116.34 cw(c10.1,111.1) 14.465,114 25.91,114 cw(c30.3,111.1) 30.3,116.361 cw(c30.3,111.1) 34.69,114 46.154,114 cw(c50.5,111.1) 50.5,116.325 cw(c50.5,111.1) 54.846,114 66.384,114 cw(c70.7,111.1) 70.7,116.3 cw(c70.7,111.1) 75.016,114 80.5,114 80.6,114.1 80.6,121.1 0.2,121.1
NetPWR3_1 on Bottom Layer "PWR22_botom" (solid, pour order 238): 0.2,0.2 80.6,0.2 80.6,7.2 75.021,7.2 cw(c70.7,10.1) 70.7,4.896 cw(c70.7,10.1) 66.379,7.2 54.892,7.2 cw(c50.5,10.1) 50.5,4.837 cw(c50.5,10.1) 46.108,7.2 34.616,7.2 cw(c30.3,10.1) 30.3,4.9 cw(c30.3,10.1) 25.984,7.2 14.465,7.2 cw(c10.1,10.1) 10.1,4.86 cw(c10.1,10.1) 5.735,7.2 0.2,7.2

## Other copper
Top Layer:
  pour cut-out: 70.7,85.7 ccw(c70.7,90.9) 75.9,90.9 ccw(c70.7,90.9) 70.7,96.1 ccw(c70.7,90.9) 65.5,90.9 ccw(c70.7,90.9)
  pour cut-out: 65.476,70.7 ccw(c70.7,70.7) 70.7,65.476 ccw(c70.7,70.7) 75.924,70.7 ccw(c70.7,70.7) 70.7,75.924 ccw(c70.7,70.7)
  pour cut-out: 65.429,50.5 ccw(c70.7,50.5) 70.7,45.229 ccw(c70.7,50.5) 75.971,50.5 ccw(c70.7,50.5) 70.7,55.771 ccw(c70.7,50.5)
  pour cut-out: 65.428,30.3 ccw(c70.7,30.3) 70.7,25.028 ccw(c70.7,30.3) 75.972,30.3 ccw(c70.7,30.3) 70.7,35.572 ccw(c70.7,30.3)
  pour cut-out: 45.233,30.3 ccw(c50.5,30.3) 50.5,25.033 ccw(c50.5,30.3) 55.767,30.3 ccw(c50.5,30.3) 50.5,35.567 ccw(c50.5,30.3)
  pour cut-out: 50.5,85.676 ccw(c50.5,90.9) 55.724,90.9 ccw(c50.5,90.9) 50.5,96.124 ccw(c50.5,90.9) 45.276,90.9 ccw(c50.5,90.9)
  pour cut-out: 50.5,65.498 ccw(c50.5,70.7) 55.702,70.7 ccw(c50.5,70.7) 50.5,75.902 ccw(c50.5,70.7) 45.298,70.7 ccw(c50.5,70.7)
  pour cut-out: 45.299,50.5 ccw(c50.5,50.5) 50.5,45.299 ccw(c50.5,50.5) 55.701,50.5 ccw(c50.5,50.5) 50.5,55.701 ccw(c50.5,50.5)
  pour cut-out: 30.3,65.5 ccw(c30.3,70.7) 35.5,70.7 ccw(c30.3,70.7) 30.3,75.9 ccw(c30.3,70.7) 25.1,70.7 ccw(c30.3,70.7)
  pour cut-out: 30.3,45.299 ccw(c30.3,50.5) 35.501,50.5 ccw(c30.3,50.5) 30.3,55.701 ccw(c30.3,50.5) 25.099,50.5 ccw(c30.3,50.5)
  pour cut-out: 25.1,30.3 ccw(c30.3,30.3) 30.3,25.1 ccw(c30.3,30.3) 35.5,30.3 ccw(c30.3,30.3) 30.3,35.5 ccw(c30.3,30.3)
  pour cut-out: 10.1,25.08 ccw(c10.1,30.3) 15.32,30.3 ccw(c10.1,30.3) 10.1,35.52 ccw(c10.1,30.3) 4.88,30.3 ccw(c10.1,30.3)
  pour cut-out: 30.3,85.667 ccw(c30.3,90.9) 35.533,90.9 ccw(c30.3,90.9) 30.3,96.133 ccw(c30.3,90.9) 25.067,90.9 ccw(c30.3,90.9)
  pour cut-out: 10.1,85.66 ccw(c10.1,90.9) 15.34,90.9 ccw(c10.1,90.9) 10.1,96.14 ccw(c10.1,90.9) 4.86,90.9 ccw(c10.1,90.9)
  pour cut-out: 10.1,65.445 ccw(c10.1,70.7) 15.355,70.7 ccw(c10.1,70.7) 10.1,75.955 ccw(c10.1,70.7) 4.845,70.7 ccw(c10.1,70.7)
  pour cut-out: 10.1,45.192 ccw(c10.1,50.5) 15.408,50.5 ccw(c10.1,50.5) 10.1,55.808 ccw(c10.1,50.5) 4.792,50.5 ccw(c10.1,50.5)
  pour cut-out: 43.25,55.6 43.75,56.1 43.75,64.634 42.784,65.6 38.192,65.6 36.921,64.33 36.921,56.429 37.75,55.6
  pour cut-out: 10.1,111.1
Bottom Layer:
  pour cut-out: 70.7,85.7 ccw(c70.7,90.9) 75.9,90.9 ccw(c70.7,90.9) 70.7,96.1 ccw(c70.7,90.9) 65.5,90.9 ccw(c70.7,90.9)
  pour cut-out: 65.476,70.7 ccw(c70.7,70.7) 70.7,65.476 ccw(c70.7,70.7) 75.924,70.7 ccw(c70.7,70.7) 70.7,75.924 ccw(c70.7,70.7)
  pour cut-out: 65.429,50.5 ccw(c70.7,50.5) 70.7,45.229 ccw(c70.7,50.5) 75.971,50.5 ccw(c70.7,50.5) 70.7,55.771 ccw(c70.7,50.5)
  pour cut-out: 65.428,30.3 ccw(c70.7,30.3) 70.7,25.028 ccw(c70.7,30.3) 75.972,30.3 ccw(c70.7,30.3) 70.7,35.572 ccw(c70.7,30.3)
  pour cut-out: 45.233,30.3 ccw(c50.5,30.3) 50.5,25.033 ccw(c50.5,30.3) 55.767,30.3 ccw(c50.5,30.3) 50.5,35.567 ccw(c50.5,30.3)
  pour cut-out: 25.1,30.3 ccw(c30.3,30.3) 30.3,25.1 ccw(c30.3,30.3) 35.5,30.3 ccw(c30.3,30.3) 30.3,35.5 ccw(c30.3,30.3)
  pour cut-out: 30.3,45.299 ccw(c30.3,50.5) 35.501,50.5 ccw(c30.3,50.5) 30.3,55.701 ccw(c30.3,50.5) 25.099,50.5 ccw(c30.3,50.5)
  pour cut-out: 45.299,50.5 ccw(c50.5,50.5) 50.5,45.299 ccw(c50.5,50.5) 55.701,50.5 ccw(c50.5,50.5) 50.5,55.701 ccw(c50.5,50.5)
  pour cut-out: 30.3,65.5 ccw(c30.3,70.7) 35.5,70.7 ccw(c30.3,70.7) 30.3,75.9 ccw(c30.3,70.7) 25.1,70.7 ccw(c30.3,70.7)
  pour cut-out: 50.5,65.498 ccw(c50.5,70.7) 55.702,70.7 ccw(c50.5,70.7) 50.5,75.902 ccw(c50.5,70.7) 45.298,70.7 ccw(c50.5,70.7)
  pour cut-out: 50.5,85.676 ccw(c50.5,90.9) 55.724,90.9 ccw(c50.5,90.9) 50.5,96.124 ccw(c50.5,90.9) 45.276,90.9 ccw(c50.5,90.9)
  pour cut-out: 10.1,45.192 ccw(c10.1,50.5) 15.408,50.5 ccw(c10.1,50.5) 10.1,55.808 ccw(c10.1,50.5) 4.792,50.5 ccw(c10.1,50.5)
  pour cut-out: 10.1,25.08 ccw(c10.1,30.3) 15.32,30.3 ccw(c10.1,30.3) 10.1,35.52 ccw(c10.1,30.3) 4.88,30.3 ccw(c10.1,30.3)
  pour cut-out: 10.1,65.445 ccw(c10.1,70.7) 15.355,70.7 ccw(c10.1,70.7) 10.1,75.955 ccw(c10.1,70.7) 4.845,70.7 ccw(c10.1,70.7)
  pour cut-out: 30.3,85.667 ccw(c30.3,90.9) 35.533,90.9 ccw(c30.3,90.9) 30.3,96.133 ccw(c30.3,90.9) 25.067,90.9 ccw(c30.3,90.9)
  pour cut-out: 10.1,85.66 ccw(c10.1,90.9) 15.34,90.9 ccw(c10.1,90.9) 10.1,96.14 ccw(c10.1,90.9) 4.86,90.9 ccw(c10.1,90.9)

## Silkscreen, mask and mechanical layers (free items; w line width, h text height)
Top Overlay:
  circle w0.7: c76.65,18.725 r1.2
  circle w0.7: c76.7,38.85 r1.2
  circle w0.7: c76.7,59.1 r1.2
  circle w0.7: c76.775,79.3 r1.2
  circle w0.7: c76.775,99.475 r1.2
  circle w0.7: c36.25,19 r1.2
  circle w0.7: c36.25,39.3 r1.2
  circle w0.7: c44.5,59.5 r1.2
  circle w0.7: c44.5,79.75 r1.2
  circle w0.7: c44.5,100 r1.2
  circle w0.7: c4.25,21.75 r1.2
  circle w0.7: c4.25,41.75 r1.2
  circle w0.7: c4.25,62 r1.2
  circle w0.7: c4.25,82.25 r1.2
  circle w0.7: c4.25,102.5 r1.2
  rectangle: 43,55.2 45.8,58.5
  rectangle: 42.97,60.64 45.8,66
  rectangle: 42.97,75.4 45.8,78.5
  rectangle: 43,80.8 45.8,86.2
  rectangle: 43,95.6 45.8,99
  rectangle: 43,101.04 45.8,106.4
  rectangle: 43,14.9 45.83,25.6
  rectangle: 43,35.1 45.83,45.8
  rectangle: 35,14.8 37.83,18
  rectangle: 35,20.24 37.83,25.6
  rectangle: 35,35.1 37.83,38.5
  rectangle: 35,40.44 37.83,45.8
  rectangle: 35,55.2 37.83,66
  rectangle: 35,75.5 37.83,86.2
  rectangle: 35,95.5 37.83,101.04
  rectangle: 35,101.04 37.83,106.4
  rectangle: 2.57,115.8 5.4,121.175
  lines w0.5: 20.2,0 20.2,80.8 40.4,80.8 40.4,121.2 ; 40.37,0.03 40.4,0.03 40.4,40.4 60.6,40.4 60.6,121.2
  text "18650 power pack 8P" at 11.75,119.2 h2.5
  text "up to 15s" at 5.775,100.35 h2.5
  text "balance" at 66.325,100.35 h2.5
  text "balance" at 66.7,80.125 h2.5
  text "balance" at 6.1,80.025 h2.5
  text "balance" at 6.1,59.925 h2.5
  text "balance" at 66.775,59.875 h2.5
  text "balance" at 6.5,39.825 h2.5
  text "balance" at 66.775,39.7 h2.5
  text "balance" at 66.575,19.5 h2.5
  text "balance" at 6.225,19.4 h2.5
  text "SenvaitisVytautas@gmail.com" at 46.4,1.025 h2.5
Bottom Overlay:
  circle w0.5: c76.65,18.725 r1.1
  circle w0.5: c76.7,38.85 r1.1
  circle w0.5: c76.7,59.1 r1.1
  circle w0.5: c76.775,79.3 r1.1
  circle w0.5: c76.775,99.475 r1.1
  circle w0.5: c36.25,19 r1.1
  circle w0.5: c36.25,39.3 r1.1
  circle w0.5: c44.5,59.5 r1.1
  circle w0.5: c44.5,79.75 r1.1
  circle w0.5: c44.5,100 r1.1
  circle w0.5: c4.25,21.75 r1.1
  circle w0.5: c4.25,41.75 r1.1
  circle w0.5: c4.25,62 r1.1
  circle w0.5: c4.25,82.25 r1.1
  circle w0.5: c4.25,102.5 r1.1
  rectangle: 34.9,20.1 37.9,25.6
  rectangle: 34.9,14.8 37.8,18.1
  rectangle: 43,14.7 45.9,25.6
  rectangle: 43.1,35 45.8,45.797
  rectangle: 34.9,35 37.8,38.5
  rectangle: 34.9,40.4 37.9,45.9
  rectangle: 43,60.6 45.9,65.997
  rectangle: 43,55.1 45.9,58.4
  rectangle: 35.1,55.2 37.8,65.9
  rectangle: 42.9,75.3 45.9,78.5
  rectangle: 42.9,80.8 45.9,86.2
  rectangle: 34.9,75.4 37.9,86.3
  rectangle: 43,95.6 45.8,99
  rectangle: 43.4,101 45.8,106.3
  rectangle: 35,95.6 37.8,106.397
  lines w0.5: 20.2,0 20.2,80.7 40.4,80.7 40.4,121.3 ; 40.4,0 40.4,40.4 60.6,40.4 60.6,121.2
  text "18650 pack" at 19.425,119.125 h2.5
  text "up to 15s" at 24.325,116.3 h2.5
  text "SenvaitisVytautas@gmail.com" at 76.275,1.725 h2.5
Mechanical 4:
  the board outline again, w0.254
Mechanical 15:
  circle w0.254: c70.7,10.1 r5.204
  circle w0.254: c70.7,30.3 r5.272
  circle w0.254: c70.7,50.5 r5.271
  circle w0.254: c70.7,70.7 r5.224
  circle w0.254: c70.7,90.9 r5.2
  circle w0.254: c70.7,111.1 r5.2
  circle w0.254: c50.5,111.1 r5.225
  circle w0.254: c50.5,90.9 r5.224
  circle w0.254: c50.5,70.7 r5.202
  circle w0.254: c50.5,50.5 r5.201
  circle w0.254: c50.5,30.3 r5.267
  circle w0.254: c50.5,10.1 r5.263
  circle w0.254: c30.3,70.7 r5.2
  circle w0.254: c30.3,50.5 r5.201
  circle w0.254: c30.3,30.3 r5.2
  circle w0.254: c30.3,10.1 r5.2
  circle w0.254: c30.3,111.1 r5.261
  circle w0.254: c30.3,90.9 r5.233
  circle w0.254: c10.1,10.1 r5.24
  circle w0.254: c10.1,30.3 r5.22
  circle w0.254: c10.1,50.5 r5.308
  circle w0.254: c10.1,70.7 r5.255
  circle w0.254: c10.1,90.9 r5.24
  circle w0.254: c10.1,111.1 r5.24